# Altium PCB Soldering_Trainer_PCB.PcbDoc
Units mil, origin at the board's own origin, x right, y up, seen from the top; angles counter-clockwise.
Board outline 3988.77 x 1420.03 mil, 2 copper layers (Top Layer, Bottom Layer); 68 components, 60 nets, 465 pads, 24 vias.
Unrouted connection lines stored in the file: 6.
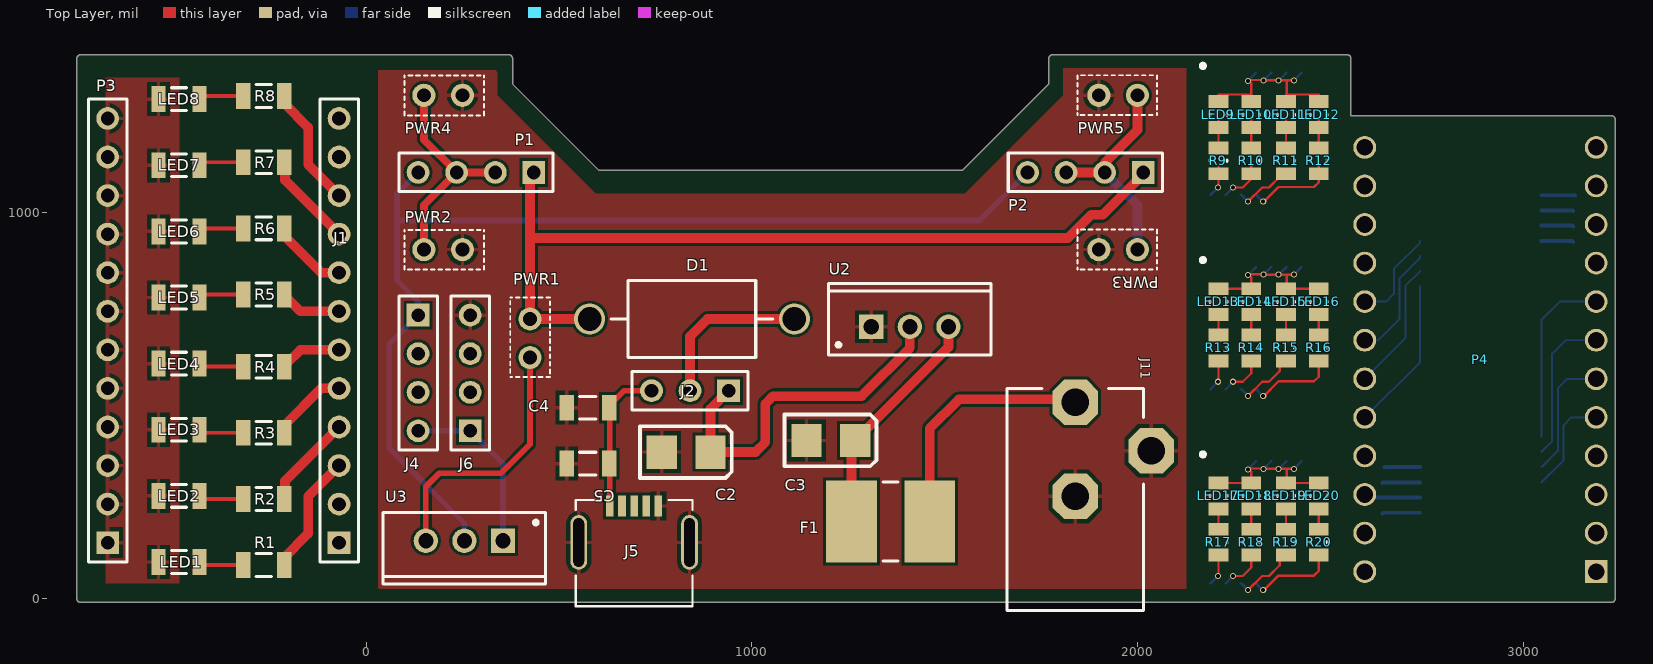
[diagram p0: Top Layer view]
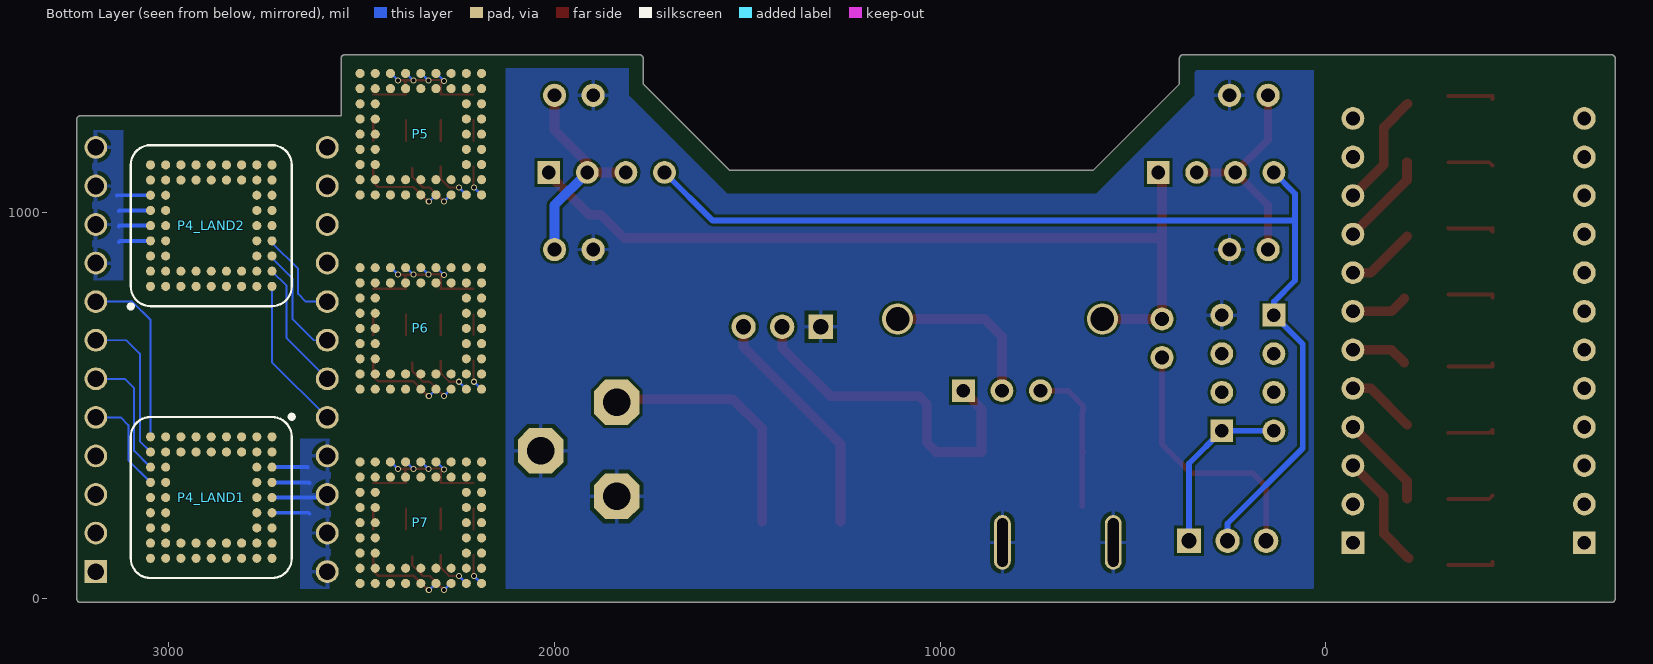
[diagram p1: Bottom Layer view, seen from below]

## Layer stack, top to bottom
Top Layer: signal copper 1.4
Dielectric: core 12.6, FR-4, Dk 4.8
Bottom Layer: signal copper 1.4

## Board outline
-750.02,0 ccw(c-740,0) -740,-10.02 3228.74,-10.02 ccw(c3228.74,0) 3238.76,0 3238.76,1242.13 ccw(c3228.74,1242.13) 3228.74,1252.14 2553.72,1252.14 2553.72,1400 ccw(c2543.7,1400) 2543.7,1410.01 1780,1410.01 ccw(c1780,1400) 1769.99,1400 1769.99,1334.15 1545.85,1110.01 604.15,1110.01 380.01,1334.15 380.01,1400 ccw(c370,1400) 370,1410.01 -740,1410.01 ccw(c-740,1400) -750.02,1400

## Design rules (kind name [scope] priority, off if disabled: settings)
Clearance [All] p1: gap=7
ComponentClearance [Not(InComponentClass('New Class')) vs Not(InComponentClass('New Class'))] p1 off: gap=10 collisioncheckmode=3 verticalgap=10 showdistances=FALSE
HoleSize [All] p1: absolutevalues=TRUE maxlimit=150 minlimit=1 maxpercent=80.000 minpercent=20.000
MinimumSolderMaskSliver [All] p1 off: minsoldermaskwidth=10
PolygonConnect [All] p1: connectstyle=Relief reliefconductorwidth=10 reliefentries=4 polygonreliefangle="90 Angle" airgapwidth=10
RoutingVias [All] p1: holewidth=28 width=50 viastyle="Through Hole" minholewidth=10 minwidth=12 maxholewidth=28 maxwidth=50
SilkToSilkClearance [All] p1 off: silktosilkclearance=10
SilkToSolderMaskClearance [IsPad] p1 off: minsilkscreentomaskgap=10 clearancetoexposedcopper=TRUE
SolderMaskExpansion [All] p1: expansion=4
Width [All] p1: maxlimit=40 minlimit=5 preferedwidth=10
23 further rules are at their usual default settings.

## Classes and differential pairs
component class Devices: C2 C3 C4 C5 D1 D? F1 J1 J2 J4 J5 J6 J11 LED1 LED2 LED3 LED4 LED5 LED6 LED7 LED8 P1 P2 P3 P4 P4_LAND1 P4_LAND2 PWR1 PWR2 PWR3 PWR4 PWR5 R1 R2 R3 R4 R5 R6 R7 R8 U2 U3
component class "U_BGA LEDs A": LED9 LED10 LED11 LED12 R9 R10 R11 R12
component class "U_BGA LEDs B": LED13 LED14 LED15 LED16 R13 R14 R15 R16
component class "U_BGA Modules": P5 P6 P7
component class "U_BGA LEDs C": LED17 LED18 LED19 LED20 R17 R18 R19 R20

## Components (designator, comment, footprint, x,y, rotation, side; value= is the part's Value field where it differs from the comment)
C2 "TAJB106K020R" AVX-CAPC3528_V 830,380 r180 top
C3 "TAJB106K020R" AVX-CAPC3528_V 1205,410 r180 top
C4 "AP 4.7uF 6.3V 1206(3216)" CAPC1206(3216)190_L 575,495 r180 top
C5 "AP 100uF 6.3V 1206(3216)" CAPC1206(3216)190_L 575,350 r180 top
D1 "1N5820RLG" ONSC-AXIAL_LEAD-2-267-05_V 845,725 r0 top
F1 "SMD2920P300TF" FUSE2920 1360,200 r0 top
J1 "Header 12" HDR1X12 -70,145 r90 top
J2 "3-WAY JUMPER" HDR1X3 920,435 r180 top
J4 "801-87-004-10-001101" HDR1X4 135,735 r270 top
J5 "UX60SC-MB-5S8" UX60SC-MB-5S8 695,0 r0 top
J6 "801-87-004-10-001101" HDR1X4 270,435 r90 top
J11 "PWR CONNECTOR" PJ-102AH 1839,509.09 r270 top
LED1 "LED_1206" RESC1206(3216)75_L -485,95 r180 top
LED2 "LED_1206" RESC1206(3216)75_L -485,266.43 r180 top
LED3 "LED_1206" RESC1206(3216)75_L -485,437.86 r180 top
LED4 "LED_1206" RESC1206(3216)75_L -485,609.29 r180 top
LED5 "LED_1206" RESC1206(3216)75_L -485,780.71 r180 top
LED6 "LED_1206" RESC1206(3216)75_L -485,952.14 r180 top
LED7 "LED_1206" RESC1206(3216)75_L -485,1123.57 r180 top
LED8 "LED_1206" RESC1206(3216)75_L -485,1295 r180 top
LED9 "LED_1206" RESC0805(2012)70_L 2210,1255 r90 top
LED10 "LED_1206" RESC0805(2012)70_L 2295,1255 r90 top
LED11 "LED_1206" RESC0805(2012)70_L 2385,1255 r90 top
LED12 "LED_1206" RESC0805(2012)70_L 2470,1255 r90 top
LED13 "LED_1206" RESC0805(2012)70_L 2210,770 r90 top
LED14 "LED_1206" RESC0805(2012)70_L 2295,770 r90 top
LED15 "LED_1206" RESC0805(2012)70_L 2385,770 r90 top
LED16 "LED_1206" RESC0805(2012)70_L 2470,770 r90 top
LED17 "LED_1206" RESC0805(2012)70_L 2210,266.32 r90 top
LED18 "LED_1206" RESC0805(2012)70_L 2295,266.32 r90 top
LED19 "LED_1206" RESC0805(2012)70_L 2385,266.32 r90 top
LED20 "LED_1206" RESC0805(2012)70_L 2470,266.32 r90 top
P1 "Header 4" HDR1X4 435,1105 r180 top
P2 "Header 4" HDR1X4 2015,1105 r180 top
P3 "Header 12" HDR1X12 -670,145 r90 top
P4 "BBCMP-P24-M1200X700" BBCMP-P24-M1200X700 3189.37,69.96 r90 top
P4_LAND1 "MODCMP-P056-M10X10_BGA" MB2100.01.A.2 2890.16,262.05 r270 bottom
P4_LAND2 "MODCMP-P056-M10X10_BGA" MB2100.01.A.2 2890.16,967.05 r90 bottom
P5 "MODCMP-P056-M10X10" MODCMP-P056-M10X10 2150,1401.06 r0 top
P6 "MODCMP-P056-M10X10" MODCMP-P056-M10X10 2150,897.38 r0 top
P7 "MODCMP-P056-M10X10" MODCMP-P056-M10X10 2150,393.7 r0 top
PWR1 "Jumper" JMP1X2 425,725 r0 top
PWR2 "Jumper" JMP1X2 250,905 r270 top
PWR3 "Jumper" JMP1X2 1900,905 r90 top
PWR4 "Jumper" JMP1X2 250,1305 r270 top
PWR5 "Jumper" JMP1X2 1900,1305 r90 top
R1 "1206" RESC1206(3216)75_L -265,87.13 r0 top
R2 "1206" RESC1206(3216)75_L -265,258.55 r0 top
R3 "1206" RESC1206(3216)75_L -265,429.98 r0 top
R4 "1206" RESC1206(3216)75_L -265,601.41 r0 top
R5 "1206" RESC1206(3216)75_L -265,788.59 r0 top
R6 "1206" RESC1206(3216)75_L -265,960.02 r0 top
R7 "1206" RESC1206(3216)75_L -265,1131.44 r0 top
R8 "1206" RESC1206(3216)75_L -265,1302.87 r0 top
R9 "0805" RESC0805(2012)70_L 2210,1135 r270 top
R10 "0805" RESC0805(2012)70_L 2295,1135 r270 top
R11 "0805" RESC0805(2012)70_L 2385,1135 r270 top
R12 "0805" RESC0805(2012)70_L 2470,1135 r270 top
R13 "0805" RESC0805(2012)70_L 2210,650 r270 top
R14 "0805" RESC0805(2012)70_L 2295,650 r270 top
R15 "0805" RESC0805(2012)70_L 2385,650 r270 top
R16 "0805" RESC0805(2012)70_L 2470,650 r270 top
R17 "0805" RESC0805(2012)70_L 2210,146.32 r270 top
R18 "0805" RESC0805(2012)70_L 2295,146.32 r270 top
R19 "0805" RESC0805(2012)70_L 2385,146.32 r270 top
R20 "0805" RESC0805(2012)70_L 2470,146.32 r270 top
U2 "LM1117T-5.0" T03B 1410,705 r0 top
U3 "LM1117T-ADJ" T03B 255,150 r180 top

## Footprints (in the part's own frame and the unit in brackets; to place one, negate y for a bottom-side part, rotate by r counter-clockwise, add the part's x,y. Pads: shape width x height; smd on the part's side, far side on the other; paste and mask are expansions set on the pad)
AVX-CAPC3528_V [mm] "SMT Capacitor, 2 Leads, Body 3.5x2.8mm"
  rect 2x2.2 smd: 1(-1.6,0) 2(1.6,0)
  silkscreen extent -3,-1.7 3.05,1.7, body extent -1.79,-1.54 1.8,1.54, height 1.9
BBCMP-P24-M1200X700 [mm] "BB component,700mil width, 1200mil high"
  rect 1.5x1.5 hole 1.1: 1(0,0)
  round 1.5 hole 1.1: 2(2.54,0) 3(5.08,0) 4(7.62,0) 5(10.16,0) 6(12.7,0) 7(15.24,0) 8(17.78,0) 9(20.32,0) 10(22.86,0) 11(25.4,0) 12(27.94,0) 13(27.94,15.24) 14(25.4,15.24) 15(22.86,15.24) 16(20.32,15.24) 17(17.78,15.24) 18(15.24,15.24) 19(12.7,15.24) 20(10.16,15.24) 21(7.62,15.24) 22(5.08,15.24) 23(2.54,15.24) 24(0,15.24)
  body extent -1.27,-1.27 29.21,16.51, height 2.49
CAPC1206(3216)190_L [mm] "Chip Capacitor, Body 3.2x1.6mm, Height 1.9mm, IPC High Density"
  rect 0.95x1.7 smd: 1(-1.4,0) 2(1.4,0)
  silkscreen extent -0.55,-0.75 0.55,0.75, body extent -1.7,-0.9 1.7,0.9, height 1.9
FUSE2920 [mm]
  rect 3.35x5.4 smd: 1(-2.575,0) 2(2.575,0)
  silkscreen extent -0.5,-2.6 0.5,2.6, body extent -3.85,-2.65 3.85,2.65, height 1
HDR1X3 [mm] "Connector; Header; 3 Position"
  rect 1.5x1.5 hole 0.9: 1(-0.508,-2.643)
  round 1.5 hole 0.9: 2(2.032,-2.643) 3(4.572,-2.643)
  silkscreen extent -1.78,-3.91 5.84,-1.37, body extent -1.78,-3.91 5.84,-1.37, height 2.67
HDR1X4 [mm] "Connector; Header; 4 Position"
  rect 1.5x1.5 hole 0.9: 1(0,0)
  round 1.5 hole 0.9: 2(2.54,0) 3(5.08,0) 4(7.62,0)
  silkscreen extent -1.27,-1.27 8.89,1.27
HDR1X12 [mm] "Connector; Header; 12 Position"
  rect 1.5x1.5 hole 0.9: 1(0,0)
  round 1.5 hole 0.9: 2(2.54,0) 3(5.08,0) 4(7.62,0) 5(10.16,0) 6(12.7,0) 7(15.24,0) 8(17.78,0) 9(20.32,0) 10(22.86,0) 11(25.4,0) 12(27.94,0)
  silkscreen extent -1.27,-1.27 29.21,1.27
JMP1X2 [mil]
  round 60 hole 35.5: 1(0,0) 2(0,-100)
  silkscreen extent -51,-151 52,56, body extent -49,-154 49,46, height 323
MB2100.01.A.2 [mm]
  round 0.6 smd mask+0.05: A1(-4,4) A2(-3,4) A3(-2,4) A4(-1,4) A5(0,4) A6(1,4) A7(2,4) A8(3,4) A9(4,4) B1(-4,3) B2(-3,3) B3(-2,3) B4(-1,3) B5(0,3) B6(1,3) B7(2,3) B8(3,3) B9(4,3) C1(-4,2) C2(-3,2) C8(3,2) C9(4,2) D1(-4,1) D2(-3,1) D8(3,1) D9(4,1) E1(-4,0) E2(-3,0) E8(3,0) E9(4,0) F1(-4,-1) F2(-3,-1) F8(3,-1) F9(4,-1) G1(-4,-2) G2(-3,-2) G8(3,-2) G9(4,-2) H1(-4,-3) H2(-3,-3) H3(-2,-3) H4(-1,-3) H5(0,-3) H6(1,-3) H7(2,-3) H8(3,-3) H9(4,-3) J1(-4,-4) J2(-3,-4) J3(-2,-4) J4(-1,-4) J5(0,-4) J6(1,-4) J7(2,-4) J8(3,-4) J9(4,-4)
  silkscreen extent -5.44,-5.3 5.3,5.42, body extent -5.01,-5.02 5.01,5, height 2.2
MODCMP-P056-M10X10 [mm] "Module Component - 1mm Pitch, 56-Pin, 10x10mm"
  round 0.6 smd far side mask+0.05: A1(1,-1) A2(2,-1) A3(3,-1) A4(4,-1) A5(5,-1) A6(6,-1) A7(7,-1) A8(8,-1) A9(9,-1) B1(1,-2) B2(2,-2) B3(3,-2) B4(4,-2) B5(5,-2) B6(6,-2) B7(7,-2) B8(8,-2) B9(9,-2) C1(1,-3) C2(2,-3) C8(8,-3) C9(9,-3) D1(1,-4) D2(2,-4) D8(8,-4) D9(9,-4) E1(1,-5) E2(2,-5) E8(8,-5) E9(9,-5) F1(1,-6) F2(2,-6) F8(8,-6) F9(9,-6) G1(1,-7) G2(2,-7) G8(8,-7) G9(9,-7) H1(1,-8) H2(2,-8) H3(3,-8) H4(4,-8) H5(5,-8) H6(6,-8) H7(7,-8) H8(8,-8) H9(9,-8) J1(1,-9) J2(2,-9) J3(3,-9) J4(4,-9) J5(5,-9) J6(6,-9) J7(7,-9) J8(8,-9) J9(9,-9)
  silkscreen extent 0.38,-0.62 0.62,-0.38
ONSC-AXIAL_LEAD-2-267-05_V [mm] "AXIAL, 2-Leads, Diameter 5.05mm"
  round 2.05 hole 1.55: 1(-6.745,0) 2(6.745,0)
  silkscreen extent -5.32,-2.53 5.32,2.53
PJ-102AH [mm]
  oct 3x3 hole 1.8: 1(0,0) 2(6.2,0) 3(3.2,5)
  silkscreen extent -0.9,-4.5 13.7,4.5, body extent -0.61,-4.49 13.79,4.91, height 11.02
RESC0805(2012)70_L [mm] "Chip Resistor, Body 2.0x1.3mm, IPC High Density"
  rect 0.85x1.3 smd: 1(-0.85,0) 2(0.85,0)
  silkscreen extent -0.05,-0.55 0.05,0.55, body extent -1.1,-0.67 1.1,0.68, height 0.7
RESC1206(3216)75_L [mm] "Chip Resistor, Body 3.2x1.6mm, IPC High Density"
  rect 0.95x1.7 smd: 1(-1.35,0) 2(1.35,0)
  silkscreen extent -0.5,-0.75 0.5,0.75, body extent -1.67,-0.87 1.67,0.87, height 0.75
T03B [mm] "TO, Thru-Hole, Vertical, Heatsink Mounted; 3 In-Line Leads; Pitch 2.54 mm"
  rect 1.6x1.6 hole 1: 1(-2.54,0)
  round 1.6 hole 1: 2(0,0) 3(2.54,0)
  silkscreen extent -5.35,-1.85 5.35,2.85, body extent -5.4,-1.9 5.4,2.9, height 19.8
UX60SC-MB-5S8 [mm]
  rect 0.5x1.4 smd: 1(-1.6,6.1) 2(-0.8,6.1) 3(0,6.1) 4(0.8,6.1) 5(1.6,6.1)
  oval 1.1x3.6 hole 0.7 slot 3.2 at 90 deg: MH1(3.65,3.7) MH2(-3.65,3.7)
  silkscreen extent -3.85,-0.5 3.85,6.5, body extent -3.85,-0.5 3.85,6.5, height 3.92

## Part data
C2 C3: library part CMP-0279-00001-1, "Capacitor, Tantalum, 10uF 10% 20V MCCT-B (3528)"
C4 C5: library part CMP-0402-0000, "CAP 100uF 6.3V ?0% 1206 (3216 Metric) Thickness 1.9mm SMD"
D1: library part CMP-1055-00027-1, "Rectifier, 2-Pin Axial_Lead, Pb-Free, Tape and Reel"
F1: library part CMP-0204-0023, "PTC RESETTABLE 16V 3A SMD 2920"
J1 P3: "Header, 12-Pin"
J2: "3-Way Jumper - Center Output"
J4 J6: "IC REG LDO 3V3 .3A SOT25"
J5: library part CMP-0300-0119, "CONN RCPT MINI USB2.0 5POS SLD"
J11: library part POWER-CONNECTOR-3, "Connector, 3 Conductor Power Jack"
LED1 LED2 LED3 LED4 LED5 LED6 LED7 LED8 LED9 LED10 LED11 LED12 LED13 LED14 LED15 LED16 LED17 LED18 LED19 LED20: library part CMP-0201-0036, "GREEN color, 1206, SMD"
P1 P2: "Header, 4-Pin"
P4_LAND1 P4_LAND2: "Module Component - 1mm Pitch, 56-Pin, 10mmX10mm"
P5 P6 P7: library part MOD-0100-0123, "Module Component - 1mm Pitch, 56-Pin, 10mmX10mm"
PWR1: library part JMP1X2_SERIES, "Standard 2 Pin Jumper, 100mil spacing"
PWR2 PWR3 PWR4 PWR5: library part JMP1X2, "Standard 2 Pin Jumper, 100mil spacing"
R1 R2 R3 R4 R5 R6 R7 R8 R9 R10 R11 R12 R13 R14 R15 R16 R17 R18 R19 R20: library part CMP-0501-0000, "Jumper 0805 (2012 Metric)"
U2: library part CMP-0062-02495-2, "800mA Low-Dropout Linear Regulator, 3-pin TO-220"
U3: library part CMP-0062-02492-2, "800mA Low-Dropout Linear Regulator, 3-pin TO-220, Pb-Free"

## Via types
v1: diameter 16, hole 10, Top Layer to Bottom Layer, tented both sides, 24 vias

## Nets (pads, with @x,y where several pads share a name; then routed paths per layer and width w, separated by ;. In a path a pad name is that pad's centre, name@x,y a point inside that pad or via, vN(x,y) a via of type N, cw(c..) or ccw(c..) an arc to the next point about the centre after c; other vN are vias at no path point)
5V0_REG: C2.1 J2.1 U2.2 | length 921
  Top Layer w25: J2.1 892.99,492.04 C2.1 1010,380 1035,405 1035,505 1055,525 1285,525 1410,650 U2.2
5V0_USB: C4.1 C5.1 J2.3 J5.1 | length 386.9
  Top Layer w15: J5.1 632.01,483.11 630.12,485 629.99,485.13 629.99,499.99 669.06,539.06 J2.3
5VOUT: D1.1 P1.1 P2.1 PWR1.1 | length 2200.5
  Top Layer w25: P1.1 425,1095 425,935 ; D1.1 PWR1.1 425,935 ; P2.1@2017.5,1102.5 1910,995 1880,995 1820,935 425,935
ADJOUT: J4.1 P1.4 P2.4 U3.2 | length 2799.2
  Bottom Layer w15: P1.4 80,1050 80,980 ; U3.2 255,195 60,390 60,660 J4.1 135,770 80,825 80,980 ; P2.4 1590,980 80,980
DC_PWR: C3.1 F1.1 U2.3 | length 609.1
  Top Layer w25: F1.1 1258.62,400.63 C3.1 1510,652.01 U2.3
GND: C2.2 C3.2 C4.2 C5.2 J5.5 J5.MH1 J5.MH2 J6.4 J11.2 J11.3 LED1.2 LED2.2 LED3.2 LED4.2 LED5.2 LED6.2 LED7.2 LED8.2 LED9.2 LED10.2 LED11.2 LED12.2 LED13.2 LED14.2 LED15.2 LED16.2 LED17.2 LED18.2 LED19.2 LED20.2 P3.1 P3.2 P3.3 P3.4 P3.5 P3.6 P3.7 P3.8 P3.9 P3.10 P3.11 P3.12 P4.9 P4.10 P4.11 P4.12 P4.21 P4.22 P4.23 P4.24 P4_LAND1.A3 P4_LAND1.A4 P4_LAND1.A5 P4_LAND1.A6 P4_LAND2.A4 P4_LAND2.A5 P4_LAND2.A6 P4_LAND2.A7 P5.A4 P5.A5 P5.A6 P5.A7 P6.A4 P6.A5 P6.A6 P6.A7 P7.A4 P7.A5 P7.A6 P7.A7 PWR2.1 PWR3.1 PWR4.1 PWR5.1 U2.1 | length 2260.3
  Top Layer w6: LED17.2 LED18.2 2295,329.32 2287,337.32 2326,337.32 v1(2327,336.32) v1(2366,336.32) 2387,336.32 ; LED13.2 LED14.2 2295,833 2287,841 2326,841 v1(2327,840) v1(2366,840) 2387,840 ; 2210,1307.15 2295,1307.15 2295,1336.68 2287,1344.68 2326,1344.68 v1(2327,1343.68) v1(2366,1343.68) 2387,1343.68 ; v1(2406,336.32) 2387,336.32 ; v1(2406,840) 2387,840 ; v1(2406,1343.68) 2387,1343.68 ; LED20.2 LED19.2 2387,301.78 2387,336.32 ; LED16.2 LED15.2 2387,805.46 2387,840 ; 2470,1307.15 2385,1307.15 2387,1309.15 2387,1343.68
  Top Layer w25: J11.3@2036.85,336.85 J11.3@2036.85,390.81
  Bottom Layer w6: v1@2288.79,337.32 P7.A4@2307.48,356.01 ; v1@2288.79,841 P6.A4@2307.48,859.69 ; v1@2288.79,1344.68 P5.A4@2307.48,1363.37 ; v1@2327.16,336.32 P7.A5@2346.85,356.01 ; v1@2327.16,840 P6.A5@2346.85,859.69 ; v1@2327.16,1343.68 P5.A5@2346.85,1363.37 ; v1@2366.53,336.32 P7.A6@2386.22,356.01 ; v1@2366.53,840 P6.A6@2386.22,859.69 ; v1@2366.53,1343.68 P5.A6@2386.22,1363.37 ; v1@2406,336.42 P7.A7@2425.59,356.01 ; v1@2406,840.1 P6.A7@2425.59,859.69 ; v1@2406,1343.78 P5.A7@2425.59,1363.37
  Bottom Layer w10: P4.22 2597.28,262.05 P4_LAND1.A5 ; 2635,220 2637.68,222.68 P4_LAND1.A6 ; 2635,300 2636.42,301.42 P4_LAND1.A4 ; 2640,340 2640.79,340.79 P4_LAND1.A3 ; P4_LAND2.A4 3127.32,927.68 3130,925 ; P4_LAND2.A5 3127.95,967.05 3130,965 ; P4_LAND2.A6 3128.58,1006.42 3130,1005 ; P4_LAND2.A7 3134.21,1045.79 3135,1045
  other v1: 2287,335 2287,838.68 2287,1342.36
LED_A1: P5.J1 R9.2 | length 82.6
  Top Layer w6: v1(2209,1066) 2210,1067 2210,1120.22
  Bottom Layer w6: v1(2209,1066) P5.J1@2189.73,1046.73 ; P5.J1@2189.73,1046.73 P5.J1 P5.J1@2189.73,1046.73
LED_A2: P5.J2 R10.2 | length 115
  Top Layer w6: v1(2248,1066) 2273,1066 2295,1088 2295,1119.68
  Bottom Layer w6: P5.J2 v1(2248,1066)
LED_A3: P5.J3 R11.2 | length 156.7
  Top Layer w6: v1(2287,1029.36) 2323.64,1066 2341.32,1066 2369,1093.68 R11.2@2369,1115.68
  Bottom Layer w6: P5.J3 2269.63,1046.73 v1(2287,1029.36)
LED_A4: P5.J4 R12.2 | length 234.7
  Top Layer w6: v1(2326,1029.36) 2328.36,1029.36 2366,1067 2458,1067 2470,1079 2470,1120.68
  Bottom Layer w6: P5.J4@2310.27,1046.73 P5.J4 2324.85,1029.36 v1(2326,1029.36)
LED_B1: P6.J1 R13.2 | length 82.6
  Top Layer w6: v1(2209,562.32) 2210,563.32 R13.2
  Bottom Layer w6: v1(2209,562.32) P6.J1@2189.73,543.05 ; P6.J1@2189.73,543.05 P6.J1 P6.J1@2189.73,543.05
LED_B2: P6.J2 R14.2 | length 115
  Top Layer w6: v1(2248,562.32) 2273,562.32 2295,584.32 R14.2@2295,616
  Bottom Layer w6: P6.J2 v1(2248,562.32)
LED_B3: P6.J3 R15.2 | length 156.7
  Top Layer w6: v1(2287,525.68) 2323.64,562.32 2341.32,562.32 2369,590 R15.2@2369,612
  Bottom Layer w6: P6.J3 2269.63,543.05 v1(2287,525.68)
LED_B4: P6.J4 R16.2 | length 234.7
  Top Layer w6: v1(2326,525.68) 2328.36,525.68 2366,563.32 2458,563.32 2470,575.32 R16.2@2470,617
  Bottom Layer w6: P6.J4@2310.27,543.05 P6.J4 2324.85,525.68 v1(2326,525.68)
LED_C1: P7.J1 R17.2 | length 82.2
  Top Layer w6: v1(2209,58.64) 2210,59.64 R17.2
  Bottom Layer w6: P7.J1 2189.73,39.37 v1(2209,58.64)
LED_C2: P7.J2 R18.2 | length 115
  Top Layer w6: v1(2248,58.64) 2273,58.64 2295,80.64 R18.2@2295,112.32
  Bottom Layer w6: P7.J2 v1(2248,58.64)
LED_C3: P7.J3 R19.2 | length 156.7
  Top Layer w6: v1(2287,22) 2323.64,58.64 2341.32,58.64 2369,86.32 R19.2@2369,108.32
  Bottom Layer w6: P7.J3 2269.63,39.37 v1(2287,22)
LED_C4: P7.J4 R20.2 | length 234.7
  Top Layer w6: v1(2326,22) 2328.36,22 2366,59.64 2458,59.64 2470,71.64 R20.2@2470,113.32
  Bottom Layer w6: P7.J4@2310.27,39.37 P7.J4 2324.85,22 v1(2326,22)
LEDA1: P4.8 P4_LAND1.J1 | length 464.4
  Bottom Layer w5: P4_LAND1.J1 3047.64,722.64 3094.96,769.96 P4.8
LEDA2: P4.7 P4_LAND1.J2 | length 395
  Bottom Layer w5: P4_LAND1.J2 3075,407.52 3075,635 3109.96,669.96 P4.7
LEDA3: P4.6 P4_LAND1.J3 | length 331.5
  Bottom Layer w5: P4_LAND1.J3 3090,383.15 3090,545 3114.96,569.96 P4.6
LEDA4: P4.5 P4_LAND1.J4 | length 265
  Bottom Layer w5: P4_LAND1.J4 3105,358.78 3105,450 3124.96,469.96 P4.5
LEDB1: P4.20 P4_LAND2.J1 | length 399
  Bottom Layer w5: P4.20 2732.68,613.27 P4_LAND2.J1
LEDB2: P4.19 P4_LAND2.J2 | length 338.3
  Bottom Layer w5: P4.19 2695,675.59 2695,811.26 P4_LAND2.J2
LEDB3: P4.18 P4_LAND2.J3 | length 298.6
  Bottom Layer w5: P4.18 2624.96,669.96 2680,725 2680,830.64 2732.68,883.32 P4_LAND2.J3
LEDB4: P4.17 P4_LAND2.J4 | length 249.6
  Bottom Layer w5: P4.17 2644.96,769.96 2665,790 2665,855.01 2732.68,922.69 P4_LAND2.J4
NetD1_2: D1.2 J2.2 | length 430.1
  Top Layer w25: J2.2 840.01,680.01 885,725 D1.2
NetF1_2: F1.2 J11.1 | length 651.2
  Top Layer w25: F1.2 1461.38,441.38 1536.79,516.79 J11.1@1840,516.79
NetJ1_3: J1.3 R1.2 | length 300.5
  Top Layer w25: R1.2@-214.33,104.33 -150,168.66 -150,265 J1.3
NetJ1_4: J1.4 R2.2 | length 244.4
  Top Layer w25: R2.2@-210,258.56 -210,305 J1.4
NetJ1_5: J1.5 R3.2 | length 179.8
  Top Layer w25: R3.2@-210.76,450.76 -116.52,545 J1.5
NetJ1_6: J1.6 R4.2 | length 146.9
  Top Layer w25: R4.2@-203.17,611.83 -170,645 J1.6
NetJ1_7: J1.7 R5.2 | length 146.9
  Top Layer w25: R5.2@-203.17,778.17 -170,745 J1.7
NetJ1_8: J1.8 R6.2 | length 179.8
  Top Layer w25: R6.2@-210.76,939.24 -116.52,845 J1.8
NetJ1_9: J1.9 R7.2 | length 244.4
  Top Layer w25: R7.2@-210,1131.44 -210,1085 J1.9
NetJ1_10: J1.10 R8.2 | length 296.9
  Top Layer w25: R8.2@-211.83,1283.17 -150,1221.34 -150,1125 J1.10
NetJ4_4: J4.4 J6.1 U3.1 | length 455.2
  Bottom Layer w15: J4.4 J6.1 355,350 U3.1
NetLED1_1: LED1.1 R1.1 | length 121.9
  Top Layer w10: LED1.1 -431.85,87 -431.72,87.13 -318.15,87.13 R1.1@-318.02,87
NetLED2_1: LED2.1 R2.1 | length 117.2
  Top Layer w10: LED2.1@-431.85,267 -423.41,258.56 R2.1
NetLED3_1: LED3.1 R3.1 | length 127.2
  Top Layer w10: LED3.1@-431.85,429 LED3.1 -423.98,429.98 R3.1 R3.1@-317.17,429
NetLED4_1: LED4.1 R4.1 | length 122.7
  Top Layer w10: LED4.1 -431.85,601 -431.44,601.41 -318.15,601.41 R4.1@-317.74,601
NetLED5_1: LED5.1 R5.1 | length 122.7
  Top Layer w10: LED5.1 -431.85,789 -431.44,788.59 -318.15,788.59 R5.1@-317.74,789
NetLED6_1: LED6.1 R6.1 | length 127.2
  Top Layer w10: LED6.1@-431.85,961 LED6.1 -423.98,960.02 R6.1 R6.1@-317.17,961
NetLED7_1: LED7.1 R7.1 | length 117.2
  Top Layer w10: LED7.1@-431.85,1123 -423.41,1131.44 R7.1
NetLED8_1: LED8.1 R8.1 | length 121.9
  Top Layer w10: LED8.1 -431.85,1303 -431.72,1302.87 -318.15,1302.87 R8.1@-318.02,1303
NetLED9_1: LED9.1 R9.1 | length 53.1
  Top Layer w6: 2210,1187.15 2210,1240.22
NetLED10_1: LED10.1 R10.1 | length 53.1
  Top Layer w6: 2295,1187.15 2295,1240.22
NetLED11_1: LED11.1 R11.1 | length 53.1
  Top Layer w6: 2385,1187.15 2385,1240.22
NetLED12_1: LED12.1 R12.1 | length 53.1
  Top Layer w6: 2470,1187.15 2470,1240.22
NetLED13_1: LED13.1 R13.1 | length 53.1
  Top Layer w6: R13.1 LED13.1
NetLED14_1: LED14.1 R14.1 | length 53.1
  Top Layer w6: R14.1 LED14.1
NetLED15_1: LED15.1 R15.1 | length 53.1
  Top Layer w6: R15.1 LED15.1
NetLED16_1: LED16.1 R16.1 | length 53.1
  Top Layer w6: R16.1 LED16.1
NetLED17_1: LED17.1 R17.1 | length 53.1
  Top Layer w6: R17.1 LED17.1
NetLED18_1: LED18.1 R18.1 | length 53.1
  Top Layer w6: R18.1 LED18.1
NetLED19_1: LED19.1 R19.1 | length 53.1
  Top Layer w6: R19.1 LED19.1
NetLED20_1: LED20.1 R20.1 | length 53.1
  Top Layer w6: R20.1 LED20.1
NetPWR1_2: PWR1.2 U3.3 | length 680.6
  Top Layer w15: U3.3 155,290 190,325 350,325 425,400 PWR1.2
PWR-L: P1.2 P1.3 PWR2.2 PWR4.2 | length 570.4
  Top Layer w20: PWR2.2 150,1020 P1.3 ; PWR4.2 150,1190 P1.3 ; P1.2 P1.3
PWR-R: P2.2 P2.3 PWR3.2 PWR5.2 | length 570.4
  Top Layer w25: P2.3 P2.2 1915,1130 2000,1215 PWR5.2
  Bottom Layer w25: P2.2 2000,1020 PWR3.2
pads on no net: J1.1 J1.2 J1.11 J1.12 J4.2 J4.3 J5.2 J5.3 J5.4 J6.2 J6.3 P4.1 P4.2 P4.3 P4.4 P4.13 P4.14 P4.15 P4.16 P4_LAND1.A1 P4_LAND1.A2 P4_LAND1.A7 P4_LAND1.A8 P4_LAND1.A9 P4_LAND1.B1 P4_LAND1.B2 P4_LAND1.B3 P4_LAND1.B4 P4_LAND1.B5 P4_LAND1.B6 P4_LAND1.B7 P4_LAND1.B8 P4_LAND1.B9 P4_LAND1.C1 P4_LAND1.C2 P4_LAND1.C8 P4_LAND1.C9 P4_LAND1.D1 P4_LAND1.D2 P4_LAND1.D8 P4_LAND1.D9 P4_LAND1.E1 P4_LAND1.E2 P4_LAND1.E8 P4_LAND1.E9 P4_LAND1.F1 P4_LAND1.F2 P4_LAND1.F8 P4_LAND1.F9 P4_LAND1.G1 P4_LAND1.G2 P4_LAND1.G8 P4_LAND1.G9 P4_LAND1.H1 P4_LAND1.H2 P4_LAND1.H3 P4_LAND1.H4 P4_LAND1.H5 P4_LAND1.H6 P4_LAND1.H7 P4_LAND1.H8 P4_LAND1.H9 P4_LAND1.J5 P4_LAND1.J6 P4_LAND1.J7 P4_LAND1.J8 P4_LAND1.J9 P4_LAND2.A1 P4_LAND2.A2 P4_LAND2.A3 P4_LAND2.A8 P4_LAND2.A9 P4_LAND2.B1 P4_LAND2.B2 P4_LAND2.B3 P4_LAND2.B4 P4_LAND2.B5 P4_LAND2.B6 P4_LAND2.B7 P4_LAND2.B8 P4_LAND2.B9 P4_LAND2.C1 P4_LAND2.C2 P4_LAND2.C8 P4_LAND2.C9 P4_LAND2.D1 P4_LAND2.D2 P4_LAND2.D8 P4_LAND2.D9 P4_LAND2.E1 P4_LAND2.E2 P4_LAND2.E8 P4_LAND2.E9 P4_LAND2.F1 P4_LAND2.F2 P4_LAND2.F8 P4_LAND2.F9 P4_LAND2.G1 P4_LAND2.G2 P4_LAND2.G8 P4_LAND2.G9 P4_LAND2.H1 P4_LAND2.H2 P4_LAND2.H3 P4_LAND2.H4 P4_LAND2.H5 P4_LAND2.H6 P4_LAND2.H7 P4_LAND2.H8 P4_LAND2.H9 P4_LAND2.J5 P4_LAND2.J6 P4_LAND2.J7 P4_LAND2.J8 P4_LAND2.J9 P5.A1 P5.A2 P5.A3 P5.A8 P5.A9 P5.B1 P5.B2 P5.B3 P5.B4 P5.B5 P5.B6 P5.B7 P5.B8 P5.B9 P5.C1 P5.C2 P5.C8 P5.C9 P5.D1 P5.D2 P5.D8 P5.D9 P5.E1 P5.E2 P5.E8 P5.E9 P5.F1 P5.F2 P5.F8 P5.F9 P5.G1 P5.G2 P5.G8 P5.G9 P5.H1 P5.H2 P5.H3 P5.H4 P5.H5 P5.H6 P5.H7 P5.H8 P5.H9 P5.J5 P5.J6 P5.J7 P5.J8 P5.J9 P6.A1 P6.A2 P6.A3 P6.A8 P6.A9 P6.B1 P6.B2 P6.B3 P6.B4 P6.B5 P6.B6 P6.B7 P6.B8 P6.B9 P6.C1 P6.C2 P6.C8 P6.C9 P6.D1 P6.D2 P6.D8 P6.D9 P6.E1 P6.E2 P6.E8 P6.E9 P6.F1 P6.F2 P6.F8 P6.F9 P6.G1 P6.G2 P6.G8 P6.G9 P6.H1 P6.H2 P6.H3 P6.H4 P6.H5 P6.H6 P6.H7 P6.H8 P6.H9 P6.J5 P6.J6 P6.J7 P6.J8 P6.J9 P7.A1 P7.A2 P7.A3 P7.A8 P7.A9 P7.B1 P7.B2 P7.B3 P7.B4 P7.B5 P7.B6 P7.B7 P7.B8 P7.B9 P7.C1 P7.C2 P7.C8 P7.C9 P7.D1 P7.D2 P7.D8 P7.D9 P7.E1 P7.E2 P7.E8 P7.E9 P7.F1 P7.F2 P7.F8 P7.F9 P7.G1 P7.G2 P7.G8 P7.G9 P7.H1 P7.H2 P7.H3 P7.H4 P7.H5 P7.H6 P7.H7 P7.H8 P7.H9 P7.J5 P7.J6 P7.J7 P7.J8 P7.J9

## Polygon pours and split planes (outlines as drawn)
GND on Bottom Layer "Top Layer-GND" (solid, pour order 6): 26.35,25 31.34,30 31.34,1370 335.62,1370 340.61,1365 340.61,1310 340.61,1305 595,1050 1552.72,1050 1807.11,1305 1807.11,1375 2126.35,1375 2126.35,25 26.35,25
GND on Bottom Layer "BTM-GND" (solid, pour order 10): 2660,415 2590,415 2580,415 2580,25 2660,25
GND on Bottom Layer "BTM-GND" (solid, pour order 9): 3118.74,824.92 3188.74,824.92 3198.74,824.92 3198.74,1214.92 3118.74,1214.92
GND on Top Layer "Top Layer-GND" (solid, pour order 7): 26.35,25 31.34,30 31.34,1370 335.62,1370 340.61,1365 340.61,1310 340.61,1305 595,1050 1552.72,1050 1807.11,1305 1807.11,1375 2126.35,1375 2126.35,25 26.35,25
GND on Top Layer "Top Layer-GND" (solid, pour order 8): -675,1350 -485,1350 -485,40 -675,40

## Silkscreen, mask and mechanical layers (free items; w line width, h text height)
Mechanical 1:
  lines w3.94: 2150,0 2543.7,0
  lines w20: -740,0 -740,1400 0,1400 300,1400 370,1400 370,1330 600,1100 1550,1100 1780,1330 1780,1400 2150,1400 2543.7,1400 2543.7,1242.13 3228.74,1242.13 3228.74,0 2543.7,0 2150,0 0,0 -740,0
Mechanical 2:
  lines w20: 0,0 0,1400 ; 2150,0 2150,1400 ; 2150,395 2545,395 ; 2150,500 2545,500 ; 2150,895 2545,895 ; 2150,1005 2545,1005 ; 2545,0 2545,1245
Notes:
  lines w10: 65,1435 25,1425 ; 265,1645 25,1425 ; 1900,1650 2140,1430 ; 2100,1440 2140,1430 ; 25,1425 35,1465 25,1425 ; 2140,1430 2130,1470 2140,1430 ; 285,1610 1885,1610 1885,1720 285,1720 285,1610
  lines w20: 0,0 0,1400 ; 2150,0 2150,1400 ; 2150,395 2545,395 ; 2150,500 2545,500 ; 2150,895 2545,895 ; 2150,1005 2545,1005 ; 2545,0 2545,1245 ; 3397,1120 4770,1120 4770,1488 3397,1488 3397,1120
  text "V Score the lines on *.GM2" at 330,1635 h60
  text "Board Outline Mech 1" at 3502,1324 h60
  text "VScore Mechanical 2" at 3502,1206 h60